# Allegro board TNSP_USBHUB3.brd
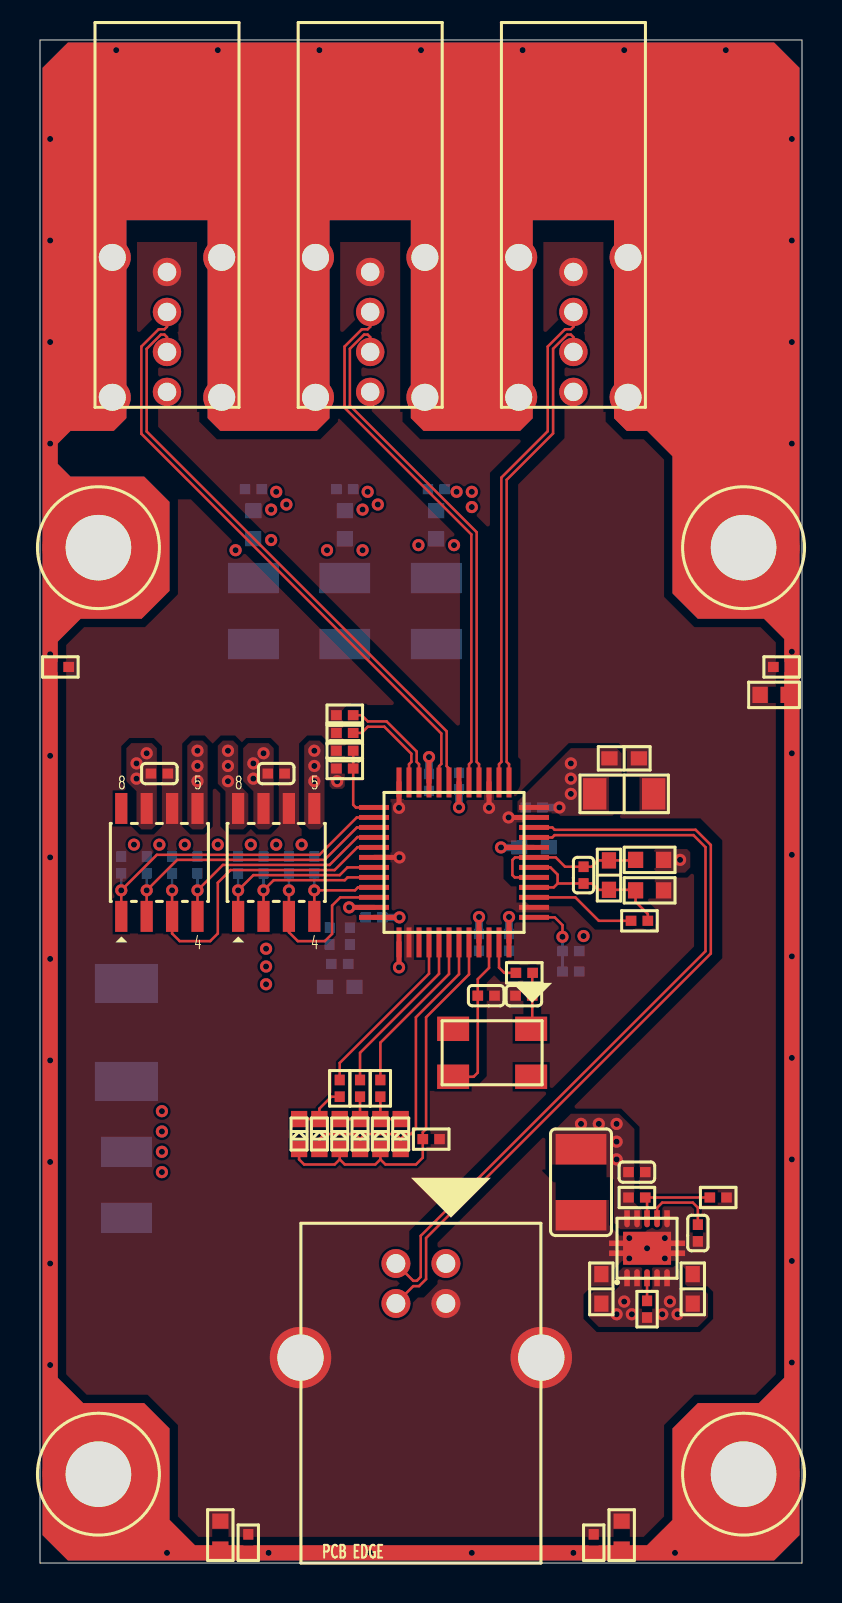
[diagram p0: board, top side]
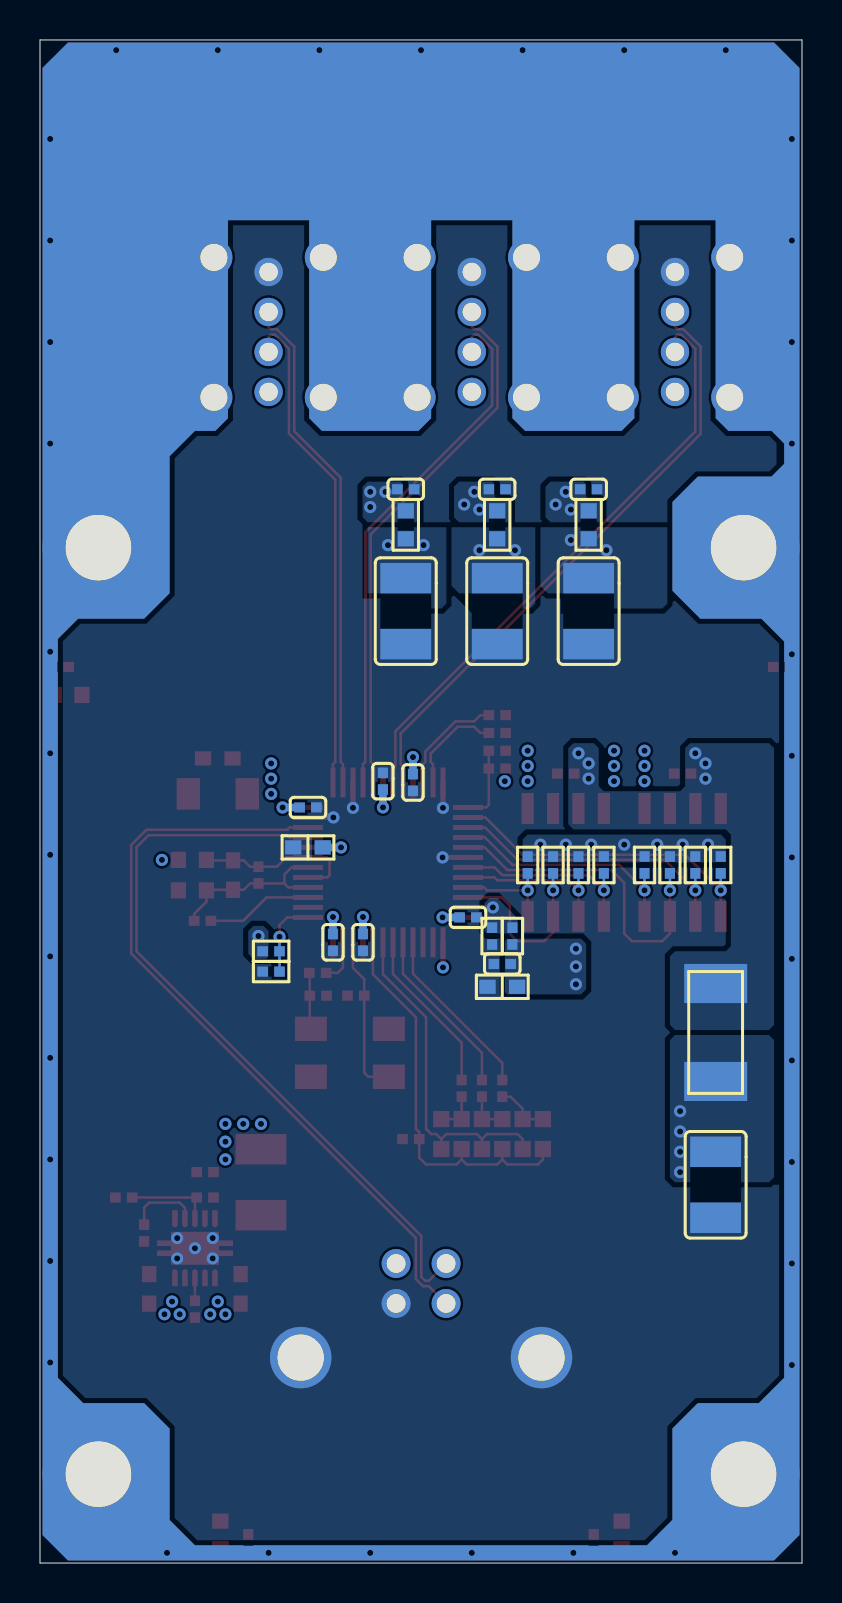
[diagram p1: board, bottom side, seen from below]

Outline 38.1 x 76.2 mm; copper layers: TOP, L2_GND, L3_PWR, BOTTOM. Coordinates in mm from the lower left corner of the outline.
Outline path: 0,76.2 0,0 38.1,0 38.1,76.2 0,76.2

## Design rules (mm)
net group USB_D1: nets USB_D1_N USB_D1_P
net group USB_D2: nets USB_D2_N USB_D2_P
net group USB_D3: nets USB_D3_N USB_D3_P
net group USB_D4: nets USB_D4_N USB_D4_P
net group USB_UP: nets USB_UP_N USB_UP_P
net group ANALOG SIGNALS: nets AVDD_2V5 AVSS_GND RREF XTAL1 XTAL2 XTAL2_R
net group GND: nets CHASSIS_GND
net group MICS. SIGNALS: nets BUS_B LDO_FB LDO_PG LDO_SS LED1 LED1_R LED2 LED2_R LED3 LED3_R LED_AMBER LED_GREEN SYSRST_L USB1_CS_L USB1_EN_L USB2_CS_L USB2_EN_L USB3_CS_L USB3_EN_L USB4_CS_L USB4_EN_L

## Placement (name value [footprint] x y rotation side)
C1  12pF  [0402C]  22.31 28.39 180 top
C2  10uF  [0603C]  14.99 28.83 180 bottom
C3  1uF  [0402C]  14.99 29.97 180 bottom
C4  12pF  [0402C]  24.19 28.38 0 top
C5  1uF  [0402C]  19.81 53.72 0 bottom
C6  1uF  [0402C]  15.24 53.72 0 bottom
C7  10uF  [0603C]  24.7 35.8 180 bottom
C8  1uF  [0402C]  20.95 39.12 270 bottom
C9  1uF  [0402C]  16.7 32.3 0 bottom
C10  1uF  [0402C]  21.95 31.05 90 bottom
C11  1uF  [0402C]  10.67 53.72 0 bottom
C13  22uF  [1206C]  29.21 38.48 180 top
C14  4.7uF  [0603C]  29.21 40.26 180 top
C15  4.7uF  [0603C]  28.45 34.42 90 top
C16  1uF  [0402C]  27.18 34.42 90 top
C17  1uF  [0402C]  15.24 40.64 0 top
C18  1uF  [0402C]  11.81 39.5 180 top
C19  100uF  [1210C]  15.24 47.62 270 bottom
C20  100uF  [1210C]  19.81 47.62 270 bottom
C21  0.1uF  [0402C]  24.7 37.8 0 bottom
C22  0.1uF  [0402C]  23.45 31.05 90 bottom
C23  0.1uF  [0402C]  19.45 39.05 90 bottom
C24  1uF  [0402C]  5.97 39.5 180 top
C26  100uF  [1210C]  10.67 47.62 270 bottom
C27  100uF  [1210C]  4.32 18.92 270 bottom
C28  1uF  [0402C]  29.84 19.56 180 top
C29  100uF  [1210C]  27.05 19.05 270 top
C30  10uF  [0603C]  32.64 13.72 270 top
C31  10uF  [0603C]  28.07 13.72 270 top
C32  DNL_1n0F  [0402C]  32.89 16.51 90 top
CN1  USB_B_RECP  [MOLEX_670688011]  19.04 10.28 0 top
CN2  USB_A_VERT_RECP  [MOLEX_672983091]  26.67 58.59 0 top
CN3  USB_A_VERT_RECP  [MOLEX_672983091]  16.51 58.59 0 top
CN4  USB_A_VERT_RECP  [MOLEX_672983091]  6.35 58.59 0 top
D1  LED_GRN_0603  [SMTLED_0603]  18.03 21.46 90 top
D2  LED_GRN_0603  [SMTLED_0603]  17.02 21.46 90 top
D3  LED_GRN_0603  [SMTLED_0603]  16 21.46 90 top
D4  LED_GRN_0603  [SMTLED_0603]  14.99 21.46 90 top
D5  LED_GRN_0603  [SMTLED_0603]  13.97 21.46 90 top
D6  LED_GRN_0603  [SMTLED_0603]  12.95 21.46 90 top
F1  2A_125V  [FUSE_SMD]  4.32 26.54 90 bottom
FB1  60OHM_100MHZ_1A  [0603L]  30.48 35.18 180 top
FB2  60OHM_100MHZ_1A  [0603L]  30.48 33.66 180 top
FB4  60OHM_100MHZ_1A  [0603L]  19.81 51.94 90 bottom
FB5  60OHM_100MHZ_1A  [0603L]  36.7 43.43 180 top
FB6  60OHM_100MHZ_1A  [0603L]  15.24 51.94 90 bottom
FB7  60OHM_100MHZ_1A  [0603L]  9.02 1.4 90 top
FB8  60OHM_100MHZ_1A  [0603L]  29.08 1.4 90 top
FB9  60OHM_100MHZ_1A  [0603L]  10.67 51.94 90 bottom
MH1  DNL  [MH_129X220_PTH]  2.92 4.45 0 top
MH2  DNL  [MH_129X220_PTH]  35.18 4.45 0 top
MH3  DNL  [MH_129X220_PTH]  2.92 50.8 0 top
MH4  DNL  [MH_129X220_PTH]  35.18 50.8 0 top
R1  33.2  [0402R]  24.21 29.53 180 top
R2  10K  [0402R]  14.48 31.37 270 bottom
R3  15K  [0402R]  15.49 31.37 90 bottom
R4  0  [0402R]  26.54 30.61 0 bottom
R5  DNL_0  [0402R]  26.54 29.59 180 bottom
R6  10K  [0402R]  19.56 21.21 180 top
R7  470  [0402R]  17.02 23.75 90 top
R8  470  [0402R]  16 23.75 90 top
R9  470  [0402R]  14.99 23.75 90 top
R11  2.43K  [0402R]  29.97 32.13 0 top
R12  10K  [0402R]  15.24 39.75 180 top
R13  510K  [0402R]  13.72 34.92 90 bottom
R14  510K  [0402R]  9.91 34.92 90 bottom
R15  10K  [0402R]  12.45 34.92 90 bottom
R16  10K  [0402R]  11.18 34.92 90 bottom
R17  510K  [0402R]  7.87 34.92 90 bottom
R18  510K  [0402R]  4.06 34.92 90 bottom
R19  10K  [0402R]  6.6 34.92 90 bottom
R20  10K  [0402R]  5.33 34.92 90 bottom
R21  3.57K  [0402R]  29.84 18.29 180 top
R22  1.15K  [0402R]  33.91 18.29 180 top
R23  10K  [0402R]  30.35 12.7 270 top
R24  0  [0402R]  15.24 41.53 0 top
R25  0  [0402R]  15.24 42.42 0 top
R26  0  [0402R]  10.41 1.02 270 top
R27  0  [0402R]  27.69 1.02 270 top
R28  0  [0402R]  37.08 44.83 0 top
R29  0  [0402R]  1.02 44.83 180 top
U1  UPD720114_QFP  [NEC_TQFP_48]  20.7 35.05 90 top
U2  AP1212  [DIODES_SOP_8L]  11.81 35.05 0 top
U3  AP1212  [DIODES_SOP_8L]  5.97 35.05 0 top
U4  TPS74801  [TI_SON_10]  30.35 15.75 0 top
X1  30MHZ_50PPM  [XTAL_VXM5]  22.61 25.53 180 top

## Library data of the parts
C1 C4 = C_12PF_0402_50V_5P_1500-1206
C2 C7 C30 C31 = C_10UF_0603_6V3_20P_1500-1141
C3 C5 C6 C8-C11 C16-C18 C24 C28 = C_1UF_0402_6V3_10P_1500-1146
C13 = C_22UF_1206_6V3_10P_1500-1097
C14 C15 = C_4U7F_0603_6V3_15P_1500-1207
C19 C20 C26 C27 C29 = C_100UF_1210_6V3_20P_1500-1194
C21-C23 = C_0U1F_0402_16V_10P_1500-1135
C32 = C_0402_16V_20P_X7R_1n0F
CN1 = 3000-1393_USB_B_RECP
CN2-CN4 = 3000-1394_USB_A_VERT_RECP
D1-D6 = LED_0603_GRN_3100-1045
F1 = FUSE_2A_125V_NANO_2300-1027
FB1 FB2 FB4-FB9 = FB_0603_60OHM_1A_2100-1019
MH1-MH4 = MH_129x220_PTH
R1 = R_33R2_0402_1P_1000-1380
R2 R6 R12 R15 R16 R19 R20 R23 = R_10K_0402_1P_1000-1234
R3 = R_15K_0402_5P_1000-1505
R4 R5 R24-R29 = R_0_0402_5P_1000-1377
R7-R9 = R_470_0402_5P_1000-1506
R11 = R_2K43_0402_1P_1000-1503
R13 R14 R17 R18 = R_510K_0402_5P_1000-1504
R21 = R_3K57_0402_1P_1000-1344
R22 = R_1K15_0402_1P_1000-1345
U1 = 4000-1384_UPD720114_TQFP48
U2 U3 = 4000-1385_AP1212L_SOL8L
U4 = IC_TPS74801_SON10_3X3_ADJ_REG
X1 = XTAL_30MHZ_4P_VXM5_1900-1069

## Footprints (pads in the part's own frame, mm; a bottom-side part is the same pattern mirrored in y, then rotated)
0402C
  rect 0.533x0.508 smd: 1(0.419,0) 2(-0.419,0)
0402R
  rect 0.533x0.508 smd: 1(0.419,0) 2(-0.419,0)
0603C
  rect 0.813x0.711 smd: 1(0.737,0) 2(-0.737,0)
0603L
  rect 0.762x0.813 smd: 1(-0.701,0) 2(0.701,0)
1206C
  rect 1.168x1.575 smd: 1(1.473,0) 2(-1.473,0)
1210C
  rect 1.524x2.54 smd: 1(-1.651,0) 2(1.651,0)
DIODES_SOP_8L
  rect 0.61x1.549 smd: 1(-1.905,-2.7) 2(-0.635,-2.7) 3(0.635,-2.7) 4(1.905,-2.7) 5(1.905,2.7) 6(0.635,2.7) 7(-0.635,2.7) 8(-1.905,2.7)
FUSE_SMD
  rect 1.956x3.15 smd: 1(-2.451,0) 2(2.451,0)
MH_129X220_PTH
  round 5.588 hole 3.277: 1(0,0)
MOLEX_670688011
  round 1.448 hole 0.94: 1(1.25,4.709) 2(-1.25,4.709) 3(-1.25,2.71) 4(1.25,2.71)
  round 3.073 hole 2.311: 5(-6.02,0) 6(6.02,0)
MOLEX_672983091
  round 1.42 hole 0.92: 1(0,0) 2(0,2) 3(0,4) 4(0,6)
  round 1.85 hole 1.35: 5(-2.735,-0.27) 6(2.735,-0.27) 7(-2.735,6.73) 8(2.735,6.73)
NEC_TQFP_48
  rect 1.5x0.25 smd: 1(-4,2.75) 2(-4,2.25) 3(-4,1.75) 4(-4,1.25) 5(-4,0.75) 6(-4,0.25) 7(-4,-0.25) 8(-4,-0.75) 9(-4,-1.25) 10(-4,-1.75) 11(-4,-2.25) 12(-4,-2.75) 25(4,-2.75) 26(4,-2.25) 27(4,-1.75) 28(4,-1.25) 29(4,-0.75) 30(4,-0.25) 31(4,0.25) 32(4,0.75) 33(4,1.25) 34(4,1.75) 35(4,2.25) 36(4,2.75)
  rect 0.25x1.5 smd: 13(-2.75,-4) 14(-2.25,-4) 15(-1.75,-4) 16(-1.25,-4) 17(-0.75,-4) 18(-0.25,-4) 19(0.25,-4) 20(0.75,-4) 21(1.25,-4) 22(1.75,-4) 23(2.25,-4) 24(2.75,-4) 37(2.75,4) 38(2.25,4) 39(1.75,4) 40(1.25,4) 41(0.75,4) 42(0.25,4) 43(-0.25,4) 44(-0.75,4) 45(-1.25,4) 46(-1.75,4) 47(-2.25,4) 48(-2.75,4)
SMTLED_0603
  rect 0.813x0.813 smd: 1(-0.749,0) 2(0.749,0)
TI_SON_10
  custom 0.28x0.85 smd: 1(-1,-1.475) 2(-0.5,-1.475) 3(0,-1.475) 4(0.5,-1.475) 5(1,-1.475) 6(1,1.475) 7(0.5,1.475) 8(0,1.475) 9(-0.5,1.475) 10(-1,1.475)
  custom 3.8x1.65 smd: 11(0,0)
XTAL_VXM5
  rect 1.6x1.219 smd: 1(-1.951,-1.199) 2(1.951,-1.199) 3(1.951,1.199) 4(-1.951,1.199)

## Nets
AVDD_2V5: C15.1 C16.1 FB1.2 U1.17(AVDD#17) U1.19(AVDD#19)
AVSS_GND: C15.2 C16.2 FB2.2 R11.1 U1.16(AVSS(R)) U1.18(AVSS)
GND: C1.2 C2.2 C3.2 C4.2 C5.2 C6.2 C7.2 C8.2 C9.2 C10.2 C11.2 C13.2 C14.2 C17.2 C18.2 C19.2 C20.2 C21.2 C22.2 C23.2 C24.2 C26.2 C27.2 C28.2 C29.2 C30.2 C31.2 C32.2 CN1.4(GND) CN1.5(FG1) CN1.6(FG2) CN2.4(GND) CN3.4(GND) CN4.4(GND) FB2.1 FB5.2 FB7.2 FB8.2 R3.2 R5.2 R6.2 R22.2 R24.2 R25.2 R26.2 R27.2 R28.2 R29.2 U1.2(VSSREG) U1.14(TEST) U1.23(VSS#23) U1.27(VSS#27) U1.36(VSS#36) U1.42(VSS#42) U2.6(GND) U3.6(GND) U4.6(GND) U4.11(PAD)
VBUS_5V0: C2.1 C3.1 C27.1 C30.1 C31.1 CN1.1(VBUS) F1.1 R2.1 R23.1 U4.1(VIN1) U4.2(VIN2) U4.4(BIAS) U4.5(EN)
VBUS_MON: R2.2 R3.1 U1.47(VBUSM)
VDD_3V3: C7.1 C8.1 C9.1 C10.1 C28.1 C29.1 R4.1 R12.1 R13.1 R14.1 R15.1 R16.1 R17.1 R18.1 R19.1 R20.1 R21.1 U1.9(VDD33#9) U1.20(VDD33#20) U1.30(VDD33#30) U1.48(VDD33REG) U4.9(VOUT2) U4.10(VOUT1)
VDDOUT_2V5: C13.1 C14.1 C21.1 C22.1 C23.1 FB1.1 U1.1(VDD25OUT) U1.12(VDD25#12) U1.24(VDD25#24) U1.33(VDD25#33)
BUS_B: R4.2 R5.1 U1.13(BUS_B)
CHASSIS_GND: CN2.5(FG1) CN2.6(FG2) CN2.7(FG3) CN2.8(FG4) CN3.5(FG1) CN3.6(FG2) CN3.7(FG3) CN3.8(FG4) CN4.5(FG1) CN4.6(FG2) CN4.7(FG3) CN4.8(FG4) FB5.1 FB7.1 FB8.1 MH1.1 MH2.1 MH3.1 MH4.1 R26.1 R27.1 R28.1 R29.1
LDO_FB: R21.2 R22.1 U4.8(FB)
LDO_PG: R23.2 U4.3(PGD)
LDO_SS: C32.1 U4.7(SS)
LED1: R7.1 U1.6(LED1)
LED1_R: D1.2(CATHODE) D2.2(CATHODE) R7.2
LED2: R8.1 U1.5(LED2)
LED2_R: D3.2(CATHODE) D4.2(CATHODE) R8.2
LED3: R9.1 U1.4(LED3)
LED3_R: D5.2(CATHODE) D6.2(CATHODE) R9.2
LED_AMBER: D2.1(ANODE) D4.1(ANODE) D6.1(ANODE) R6.1 U1.8(AMBER)
LED_GREEN: D1.1(ANODE) D3.1(ANODE) D5.1(ANODE) U1.7(GREEN)
RREF: R11.2 U1.15(RREF)
SYSRST_L: C17.1 R12.2 U1.37(SYSRSTB)
USB1_CS_L: R15.2 U1.46(CSB1) U2.3(FLG2)
USB1_EN_L: R13.2 U1.45(PPB1) U2.4(EN2_L)
USB2_CS_L: R16.2 U1.44(CSB2) U2.2(FLG1)
USB2_EN_L: R14.2 U1.43(PPB2) U2.1(EN1_L)
USB3_CS_L: R19.2 U1.41(CSB3) U3.3(FLG2)
USB3_EN_L: R17.2 U1.40(PPB3) U3.4(EN2_L)
USB4_CS_L: R20.2 U1.39(CSB4) U3.2(FLG1)
USB4_EN_L: R18.2 U1.38(PPB4) U3.1(EN1_L)
USB_D1_N: CN2.2(D_N) U1.25(DM1)
USB_D1_P: CN2.3(D_P) U1.26(DP1)
USB_D2_N: CN3.2(D_N) U1.28(DM2)
USB_D2_P: CN3.3(D_P) U1.29(DP2)
USB_D3_N: CN4.2(D_N) U1.31(DM3)
USB_D3_P: CN4.3(D_P) U1.32(DP3)
USB_D4_N: R25.1 U1.34(DM4)
USB_D4_P: R24.1 U1.35(DP4)
USB_UP_N: CN1.2(D_N) U1.21(DMU)
USB_UP_P: CN1.3(D_P) U1.22(DPU)
VFIL1_5V0: C5.1 CN2.1(VBUS) FB4.2
VFIL2_5V0: C6.1 CN3.1(VBUS) FB6.2
VFIL3_5V0: C11.1 CN4.1(VBUS) FB9.2
VPORT1_5V0: C20.1 FB4.1 U2.5(OUT2)
VPORT2_5V0: C19.1 FB6.1 U2.8(OUT1)
VPORT3_5V0: C26.1 FB9.1 U3.5(OUT2)
VPORT_5V0: C18.1 C24.1 F1.2 U2.7(IN) U3.7(IN)
XTAL1: C1.1 U1.10(X1) X1.3(X2)
XTAL2: R1.1 U1.11(X2)
XTAL2_R: C4.1 R1.2 X1.1(X1)

Pads without a net: U1 3; U3 8; X1 2 4

## Via types
v1: diameter 0.61, hole 0.305, TOP to BOTTOM, 125 vias

## Routing (per net, layer and track width the routed paths; a pad name or vN(x,y) marks a point on that pad's centre or on a via; arc(x,y) is an arc through that point)
AVDD_2V5: length 8.4
  TOP w0.127: FB1.2 29.75,35.15 C15.1 27.91,35.15 27.6,34.84 C16.1 26.25,34.84 25.79,35.3 U1.19 23.75,35.3 23.62,35.17 23.62,34.42 23.74,34.3 U1.17
AVSS_GND: length 8.9
  TOP w0.127: R11.1 30.39,32.47 29.78,33.09 FB2.2 29.75,33.68 C15.2 27.91,33.68 27.6,34 C16.2 25.88,34 ; 25.88,34 25.88,34.44 25.52,34.8 U1.18 ; 25.88,34 25.68,33.8 U1.16
GND: length 5.1
  TOP w0.254: U1.36 v1(17.95,37.78) ; U1.27 v1(22.45,37.78) ; U1.23 v1(23.43,37.3) ; U1.42 v1(17.97,35.3)
  vias: v1(29.46,16.26) v1(29.46,15.24) v1(30.35,15.75) v1(31.24,16.26) v1(31.24,15.24)
VBUS_5V0:
  vias: v1(6.1,22.61) v1(6.1,21.59) v1(6.1,20.57) v1(6.1,19.56) v1(11.3,30.73) v1(11.3,29.84) v1(11.3,28.96) v1(28.83,12.45) v1(29.21,13.08) v1(29.59,12.45) v1(31.11,12.45) v1(31.5,13.08) v1(31.88,12.45)
VBUS_MON: length 1.2
  TOP w0.254: U1.47 v1(15.46,32.8)
VDD_3V3: length 8.9
  TOP w0.254: U1.30 v1(20.95,37.81) ; U1.20 v1(23.05,35.8) ; v1(17.97,32.3) U1.48 ; U1.9 v1(21.95,32.32)
  BOTTOM w0.381: C8.1 20.95,38.69 v1(20.95,37.81) ; v1(21.95,32.32) C10.1 ; C9.1 v1(17.97,32.3) ; v1(23.05,35.8) C7.1
  vias: v1(4.7,35.94) v1(5.97,35.94) v1(7.24,35.94) v1(8.89,35.94) v1(10.54,35.94) v1(11.81,35.94) v1(13.08,35.94) v1(14.86,39.12) v1(27.05,21.97) v1(27.18,31.37) v1(27.94,21.97) v1(28.83,21.97) v1(28.83,21.08) v1(28.83,20.19)
VDDOUT_2V5: length 6.3
  TOP w0.254: U1.12 v1(23.45,32.32) ; U1.1 v1(17.95,29.8) ; v1(19.45,40.32) U1.33
  BOTTOM w0.381: C21.1 v1(25.97,37.8) ; v1(23.45,32.32) C22.1 ; C23.1 v1(19.45,40.32)
  vias: v1(26.54,40.01) v1(26.54,39.24) v1(26.54,38.48) v1(32,35.18)
BUS_B: length 3.9
  TOP w0.127: v1(26.12,31.33) 26.12,31.92 25.74,32.3 U1.13
  BOTTOM w0.127: v1(26.12,31.33) R4.2 R5.1
CHASSIS_GND:
  vias: v1(0.51,71.25) v1(0.51,66.17) v1(0.51,61.09) v1(0.51,56.01) v1(0.51,45.47) v1(0.51,40.39) v1(0.51,35.31) v1(0.51,30.23) v1(0.51,25.15) v1(0.51,20.07) v1(0.51,14.99) v1(0.51,9.91) v1(3.81,75.69) v1(6.35,0.51) v1(8.89,75.69) v1(11.43,0.51) v1(13.97,75.69) v1(16.51,0.51) v1(19.05,75.69) v1(21.59,0.51) v1(24.13,75.69) v1(26.67,0.51) v1(29.21,75.69) v1(31.75,0.51) v1(34.29,75.69) v1(37.59,71.25) v1(37.59,66.17) v1(37.59,61.09) v1(37.59,56.01) v1(37.59,45.59) v1(37.59,40.51) v1(37.59,35.43) v1(37.59,30.35) v1(37.59,25.27) v1(37.59,20.19) v1(37.59,15.11) v1(37.59,10.03)
LDO_FB: length 4.3
  TOP w0.127: U4.8 30.35,18.2 R21.2 R22.1
LDO_PG: length 1.2
  TOP w0.127: U4.3 R23.2
LDO_SS: length 3.7
  TOP w0.127: U4.7 30.85,17.77 31.11,18.03 32.64,18.03 32.89,17.78 C32.1
LED1: length 8.3
  TOP w0.127: R7.1 17.02,26.04 20.45,29.47 U1.6
LED1_R: length 2.1
  TOP w0.127: D1.2 D2.2 R7.2
LED2: length 8.5
  TOP w0.127: U1.5 19.95,29.48 16,25.53 R8.1
LED2_R: length 2.1
  TOP w0.127: R8.2 D3.2 D4.2
LED3: length 8.7
  TOP w0.127: U1.4 19.45,29.48 14.99,25.02 R9.1
LED3_R: length 2.8
  TOP w0.127: D6.2 D5.2 13.97,22.73 14.57,23.33 R9.2
LED_AMBER: length 20.1
  TOP w0.127: 14.99,20.19 14.73,19.94 13.21,19.94 12.95,20.19 D6.1 ; 14.99,20.19 15.24,19.94 16.76,19.94 17.02,20.19 ; 14.99,20.19 D4.1 ; 17.02,20.19 D2.1 ; 17.02,20.19 17.27,19.94 18.8,19.94 19.14,20.28 R6.1 19.14,21.55 19.3,21.72 19.3,27.3 21.45,29.45 U1.8
LED_GREEN: length 17.2
  TOP w0.127: U1.7 20.95,29.46 18.8,27.3 18.8,21.72 18.54,21.46 18.29,21.46 18.03,21.21 ; D1.1 18.03,21.21 ; 18.03,21.21 17.78,21.46 16.26,21.46 16,21.21 ; 16,21.21 15.75,21.46 14.22,21.46 13.97,21.21 D5.1 ; 16,21.21 D3.1
RREF: length 5.3
  TOP w0.127: U1.15 26.77,33.3 27.94,32.13 R11.2
SYSRST_L: length 3.8
  TOP w0.127: U1.37 15.79,37.8 15.66,37.93 R12.2 C17.1
USB1_CS_L: length 9.1
  TOP w0.127: U1.46 15.01,33.3 14.6,32.89 14.6,31.48 14.24,31.12 12.89,31.12 12.45,31.56 U2.3 v1(12.45,33.66)
  BOTTOM w0.127: R15.2 v1(12.45,33.66)
USB1_EN_L: length 5.2
  TOP w0.127: U2.4 v1(13.72,33.66) 15.75,33.66 15.9,33.8 U1.45
  BOTTOM w0.127: R13.2 v1(13.72,33.66)
USB2_CS_L: length 7.9
  TOP w0.127: U2.2 v1(11.18,33.66) 11.68,34.16 15.24,34.16 15.38,34.3 U1.44
  BOTTOM w0.127: R16.2 v1(11.18,33.66)
USB2_EN_L: length 9.4
  TOP w0.127: U1.43 15.37,34.8 14.99,34.42 10.67,34.42 v1(9.91,33.66) U2.1
  BOTTOM w0.127: R14.2 v1(9.91,33.66)
USB3_CS_L: length 16.7
  TOP w0.127: v1(6.6,33.66) U3.3 6.6,31.5 6.98,31.12 8.51,31.12 8.89,31.5 8.89,34.04 9.53,34.67 14.73,34.67 15.88,35.81 16.69,35.81 U1.41
  BOTTOM w0.127: R19.2 v1(6.6,33.66)
USB3_EN_L: length 12.1
  TOP w0.127: U3.4 v1(7.87,33.66) 9.14,34.92 14.48,34.92 15.88,36.32 16.68,36.32 U1.40
  BOTTOM w0.127: R17.2 v1(7.87,33.66)
USB4_CS_L: length 14.8
  TOP w0.127: 5.33,32.35 v1(5.33,33.66) 6.86,35.18 14.22,35.18 15.85,36.8 U1.39
  BOTTOM w0.127: R20.2 v1(5.33,33.66)
USB4_EN_L: length 16.3
  TOP w0.127: U3.1 v1(4.06,33.66) 5.84,35.43 13.97,35.43 15.84,37.3 U1.38
  BOTTOM w0.127: R18.2 v1(4.06,33.66)
USB_D1_N: length 24.8
  TOP w0.127: U1.25 23.45,39.97 23.33,40.08 23.33,54.2 25.65,56.52 25.65,60.75 26.36,61.46 26.54,61.46 26.67,61.33 CN2.2
USB_D1_P: length 25.3
  TOP w0.127: CN2.3 26.67,61.85 26.54,61.73 26.25,61.73 25.39,60.86 25.39,56.63 23.07,54.31 23.07,40.08 22.95,39.97 U1.26
USB_D2_N: length 26.5
  TOP w0.127: CN3.2 16.51,61.33 16.38,61.46 16.2,61.46 15.49,60.75 15.49,57.91 21.83,51.57 21.83,40.08 21.95,39.97 U1.28
USB_D2_P: length 26.9
  TOP w0.127: U1.29 21.45,39.97 21.57,40.08 21.57,51.46 15.23,57.8 15.23,60.86 16.09,61.73 16.38,61.73 16.51,61.85 CN3.3
USB_D3_N: length 30.1
  TOP w0.127: U1.31 20.45,39.75 20.33,39.87 20.33,41.61 5.33,56.61 5.33,60.75 6.04,61.46 6.22,61.46 6.35,61.33 CN4.2
USB_D3_P: length 30.5
  TOP w0.127: U1.32 19.95,39.86 20.07,39.98 20.07,41.5 5.07,56.5 5.07,60.86 5.93,61.73 6.22,61.73 6.35,61.85 CN4.3
USB_D4_N: length 5.5
  TOP w0.127: R25.1 16.08,42.42 16.39,42.11 17.33,42.11 18.83,40.6 18.83,40.08 18.95,39.97 U1.34
USB_D4_P: length 5.1
  TOP w0.127: U1.35 18.45,39.97 18.57,40.08 18.57,40.49 17.22,41.84 16.39,41.84 16.08,41.53 R24.1
USB_UP_N: length 37.9
  TOP w0.127: U1.21 25.61,36.3 25.73,36.42 32.67,36.42 33.27,35.81 33.27,30.61 19.04,16.37 19.04,14.32 18.84,14.12 18.66,14.12 CN1.2
USB_UP_P: length 38.8
  TOP w0.127: CN1.3 18.66,13.85 18.95,13.85 19.3,14.21 19.3,16.26 33.54,30.5 33.54,35.92 32.78,36.69 25.73,36.69 25.61,36.8 U1.22
VFIL1_5V0:
  vias: v1(20.83,53.59) v1(21.59,53.59) v1(21.59,52.83)
VFIL2_5V0:
  vias: v1(16.13,52.7) v1(16.38,53.59) v1(16.89,52.96)
VFIL3_5V0:
  vias: v1(11.56,52.7) v1(11.81,53.59) v1(12.32,52.96)
VPORT1_5V0:
  vias: v1(13.72,40.64) v1(13.72,39.88) v1(13.72,39.12) v1(18.92,50.93) v1(20.7,50.93)
VPORT2_5V0:
  vias: v1(9.4,40.64) v1(9.4,39.88) v1(9.4,39.12) v1(14.35,50.67) v1(16.13,50.67)
VPORT3_5V0:
  vias: v1(7.87,40.64) v1(7.87,39.88) v1(7.87,39.12) v1(9.78,50.67) v1(11.56,51.18)
VPORT_5V0:
  vias: v1(4.83,40.01) v1(4.83,39.24) v1(5.33,40.51) v1(10.67,40.01) v1(10.67,39.24) v1(11.18,40.51)
XTAL1: length 8.1
  TOP w0.127: U1.10 22.45,29.77 21.89,29.21 C1.1 21.89,24.54 21.68,24.33 X1.3
XTAL2: length 2.2
  TOP w0.127: R1.1 23.21,29.53 22.95,29.79 U1.11
XTAL2_R: length 2.8
  TOP w0.127: R1.2 24.61,29.51 C4.1 24.61,26.78 X1.1

## Copper pours and planes (outline as drawn; the poured copper is in the pictures)
GND on TOP: 0.76,0.89 37.21,0.89 37.21,75.31 0.76,75.31 ; 15 cut-outs
GND on BOTTOM: 5.21,6.86 5.21,2.41 7.11,0.51 32.51,0.51 33.27,1.27 33.27,2.79 33.21,2.86 37.46,7.11 37.46,64.13 32.89,68.71 14.73,68.71 14.73,67.06 10.29,62.61 8.89,62.61 8.89,65.66 8.51,66.04 8.51,67.44 5.84,67.44 5.59,67.18 5.59,67.06 4.45,67.06 4.45,66.04 4.19,66.04 4.19,62.74 1.27,59.82 1.27,54.48 0.38,53.59 0.38,25.53 0.76,25.15 0.38,24.77 0.38,9.14 2.67,6.86 ; 1 cut-out
GND on L2_GND: 7.11,0.44 5.21,2.35 5.21,6.79 2.67,6.79 0.38,9.08 0.38,24.7 0.76,25.08 0.38,25.46 0.38,53.53 1.27,54.42 1.27,59.75 4.19,62.67 4.19,65.98 4.45,65.98 4.45,66.99 5.59,66.99 5.59,67.12 5.84,67.37 8.51,67.37 8.51,65.98 8.89,65.6 8.89,62.55 10.29,62.55 14.73,66.99 14.73,68.64 32.89,68.64 37.46,64.07 37.46,7.05 33.21,2.79 33.27,2.73 33.27,1.21 32.51,0.44
VBUS_5V0 on TOP: 32,14.61 32,13.84 32.26,13.59 33.27,13.59 33.4,13.46 33.4,12.32 32.89,11.81 27.94,11.81 27.43,12.32 27.43,13.34 27.69,13.59 28.7,13.59 28.96,13.84 28.96,14.61 29.21,14.86 31.75,14.86
VBUS_5V0 on BOTTOM: 6.35,19.05 6.6,19.3 6.6,26.16 6.35,26.42 1.65,26.42 1.4,26.16 1.4,19.3 1.65,19.05
VBUS_5V0 on BOTTOM: 14.73,31.24 14.86,31.12 14.86,28.57 14.73,28.45 11.05,28.45 10.79,28.7 10.79,30.99 11.05,31.24
VBUS_5V0 on L3_PWR: 37.85,1.91 36.58,0.64 1.65,0.64 0.38,1.91 0.38,33.02 11.18,33.02 12.45,31.75 12.45,23.5 18.8,17.14 37.85,17.14
VBUS_MON on BOTTOM: 15.88,33.02 15.62,33.27 15.24,33.27 14.22,32.26 14.22,31.5 15.75,31.5 15.88,31.62
VDD_3V3 on TOP: 29.08,16.64 28.7,17.02 28.7,19.18 28.57,19.3 25.78,19.3 25.65,19.43 25.78,19.43 25.78,19.94 25.53,19.94 25.53,21.46 26.54,22.48 28.96,22.48 29.72,21.72 29.72,18.03 30.1,17.65 30.1,16.76 29.97,16.64
VDD_3V3 on BOTTOM: 3.81,35.05 13.97,35.05 13.97,36.2 13.72,36.45 4.06,36.45 3.81,36.2
VDD_3V3 on BOTTOM: 26.67,30.35 26.8,30.23 27.43,30.23 27.69,30.48 27.69,31.62 27.43,31.88 26.92,31.88 26.67,31.62
VDD_3V3 on L3_PWR: 37.85,17.14 18.8,17.14 12.45,23.5 12.45,31.75 11.18,33.02 0.38,33.02 0.38,47.62 4.83,47.62 6.1,46.35 6.1,37.47 14.35,37.47 14.35,40.01 14.99,40.64 17.53,40.64 19.43,38.73 23.88,38.73 23.88,34.92 22.61,33.66 22.61,31.12 16.89,31.12 16.89,28.57 18.16,27.3 23.88,27.3 25.15,28.57 25.15,31.75 27.05,33.66 37.85,33.66
VDDOUT_2V5 on TOP: 30.86,34.54 30.61,34.8 30.61,35.56 30.86,35.81 32.26,35.81 32.51,35.56 32.51,34.8 32.26,34.54
VDDOUT_2V5 on TOP: 28.83,40.77 29.08,40.51 29.08,37.85 28.57,37.34 25.78,37.34 25.65,37.47 23.88,37.47 23.88,38.1 26.54,40.77
VDDOUT_2V5 on L3_PWR: 17.53,43.81 17.53,40.64 19.43,38.73 23.88,38.73 23.88,34.92 22.61,33.66 22.61,31.12 16.89,31.12 16.89,27.3 25.15,27.3 25.15,31.75 27.05,33.66 37.85,33.66 37.85,46.35 32.13,52.07 21.97,52.07 21.97,48.26
CHASSIS_GND on TOP (solid shape): 37.97,74.8 37.97,1.4 36.7,0.13 1.4,0.13 0.13,1.4 0.13,45.09 0.86,45.09 0.86,44.58 0.89,44.58 0.89,9.27 2.16,8 5.21,8 6.48,6.73 6.48,2.16 7.75,0.89 10.16,0.89 10.16,0.86 10.67,0.86 10.67,0.89 27.43,0.89 27.43,0.86 27.94,0.86 27.94,0.89 30.35,0.89 31.62,2.16 31.62,6.73 32.89,8 35.94,8 37.21,9.27 37.21,44.58 37.24,44.58 37.24,45.09 37.21,45.09 37.21,46.23 36.2,47.24 32.89,47.24 31.62,48.51 31.62,55.37 30.35,56.64 29.34,56.64 28.7,57.28 28.7,67.18 24.64,67.18 24.64,57.28 24,56.64 19.18,56.64 18.54,57.28 18.54,67.18 14.48,67.18 14.48,57.28 13.84,56.64 9.02,56.64 8.38,57.28 8.38,67.18 4.32,67.18 4.32,57.28 3.68,56.64 1.52,56.64 0.89,56.01 0.89,54.99 1.52,54.36 5.21,54.36 6.48,53.09 6.48,48.64 5.08,47.24 2.03,47.24 0.89,46.1 0.89,45.09 0.13,45.09 0.13,74.8 1.4,76.07 36.7,76.07
CHASSIS_GND on BOTTOM (solid shape): 37.97,74.8 37.97,1.4 36.7,0.13 1.4,0.13 0.13,1.4 0.13,45.09 0.86,45.09 0.86,44.58 0.89,44.58 0.89,9.27 2.16,8 5.21,8 6.48,6.73 6.48,2.16 7.75,0.89 10.16,0.89 10.16,0.86 10.67,0.86 10.67,0.89 27.43,0.89 27.43,0.86 27.94,0.86 27.94,0.89 30.35,0.89 31.62,2.16 31.62,6.73 32.89,8 35.94,8 37.21,9.27 37.21,44.58 37.24,44.58 37.24,45.09 37.21,45.09 37.21,46.23 36.2,47.24 32.89,47.24 31.62,48.51 31.62,55.37 30.35,56.64 29.34,56.64 28.7,57.28 28.7,67.18 24.64,67.18 24.64,57.28 24,56.64 19.18,56.64 18.54,57.28 18.54,67.18 14.48,67.18 14.48,57.28 13.84,56.64 9.02,56.64 8.38,57.28 8.38,67.18 4.32,67.18 4.32,57.28 3.68,56.64 1.52,56.64 0.89,56.01 0.89,54.99 1.52,54.36 5.21,54.36 6.48,53.09 6.48,48.64 5.08,47.24 2.03,47.24 0.89,46.1 0.89,45.09 0.13,45.09 0.13,74.8 1.4,76.07 36.7,76.07
CHASSIS_GND on L2_GND (solid shape): 37.97,74.8 37.97,1.4 36.7,0.13 1.4,0.13 0.13,1.4 0.13,45.09 0.86,45.09 0.86,44.58 0.89,44.58 0.89,9.27 2.16,8 5.21,8 6.48,6.73 6.48,2.16 7.75,0.89 10.16,0.89 10.16,0.86 10.67,0.86 10.67,0.89 27.43,0.89 27.43,0.86 27.94,0.86 27.94,0.89 30.35,0.89 31.62,2.16 31.62,6.73 32.89,8 35.94,8 37.21,9.27 37.21,44.58 37.24,44.58 37.24,45.09 37.21,45.09 37.21,46.23 36.2,47.24 32.89,47.24 31.62,48.51 31.62,55.37 30.35,56.64 29.34,56.64 28.7,57.28 28.7,67.18 24.64,67.18 24.64,57.28 24,56.64 19.18,56.64 18.54,57.28 18.54,67.18 14.48,67.18 14.48,57.28 13.84,56.64 9.02,56.64 8.38,57.28 8.38,67.18 4.32,67.18 4.32,57.28 3.68,56.64 1.52,56.64 0.89,56.01 0.89,54.99 1.52,54.36 5.21,54.36 6.48,53.09 6.48,48.64 5.08,47.24 2.03,47.24 0.89,46.1 0.89,45.09 0.13,45.09 0.13,74.8 1.4,76.07 36.7,76.07
CHASSIS_GND on L3_PWR (solid shape): 37.97,74.8 37.97,1.4 36.7,0.13 1.4,0.13 0.13,1.4 0.13,45.09 0.86,45.09 0.86,44.58 0.89,44.58 0.89,9.27 2.16,8 5.21,8 6.48,6.73 6.48,2.16 7.75,0.89 10.16,0.89 10.16,0.86 10.67,0.86 10.67,0.89 27.43,0.89 27.43,0.86 27.94,0.86 27.94,0.89 30.35,0.89 31.62,2.16 31.62,6.73 32.89,8 35.94,8 37.21,9.27 37.21,44.58 37.24,44.58 37.24,45.09 37.21,45.09 37.21,46.23 36.2,47.24 32.89,47.24 31.62,48.51 31.62,55.37 30.35,56.64 29.34,56.64 28.7,57.28 28.7,67.18 24.64,67.18 24.64,57.28 24,56.64 19.18,56.64 18.54,57.28 18.54,67.18 14.48,67.18 14.48,57.28 13.84,56.64 9.02,56.64 8.38,57.28 8.38,67.18 4.32,67.18 4.32,57.28 3.68,56.64 1.52,56.64 0.89,56.01 0.89,54.99 1.52,54.36 5.21,54.36 6.48,53.09 6.48,48.64 5.08,47.24 2.03,47.24 0.89,46.1 0.89,45.09 0.13,45.09 0.13,74.8 1.4,76.07 36.7,76.07
VFIL1_5V0 on BOTTOM: 19.94,53.34 19.81,53.21 19.3,53.21 19.18,53.09 19.18,52.2 19.3,52.07 21.72,52.07 21.97,52.32 21.97,53.85 21.72,54.1 20.07,54.1 19.94,53.98
VFIL1_5V0 on L3_PWR: 17.4,52.07 31.62,52.07 31.62,66.93 30.1,68.45 25.53,68.45 19.18,62.1 19.18,56.64 17.4,54.86
VFIL2_5V0 on BOTTOM: 15.37,53.34 15.24,53.21 14.73,53.21 14.6,53.09 14.6,52.2 14.73,52.07 17.14,52.07 17.4,52.32 17.4,53.85 17.14,54.1 15.49,54.1 15.37,53.98
VFIL2_5V0 on L3_PWR: 13.08,52.07 17.53,52.07 17.53,54.99 19.18,56.64 18.54,57.28 18.54,67.18 14.48,67.18 14.48,57.28 13.84,56.64 13.08,56.64
VFIL3_5V0 on BOTTOM: 10.79,53.34 10.67,53.21 10.16,53.21 10.03,53.09 10.03,52.2 10.16,52.07 12.57,52.07 12.83,52.32 12.83,53.85 12.57,54.1 10.92,54.1 10.79,53.98
VFIL3_5V0 on BOTTOM: 13.08,52.07 13.08,56.64 9.02,56.64 8.38,57.28 8.38,67.18 4.32,67.18 4.32,57.28 3.68,56.64 1.52,56.64 0.89,56.01 0.89,54.99 1.52,54.36 5.21,54.36 6.48,53.09 6.48,52.07
VFIL3_5V0 on L3_PWR: 13.08,52.07 13.08,56.64 9.02,56.64 8.38,57.28 8.38,67.31 4.32,67.31 4.32,57.28 3.68,56.64 1.52,56.64 0.89,56.01 0.89,54.99 1.52,54.36 5.21,54.36 6.48,53.09 6.48,52.07
VPORT1_5V0 on TOP: 14.22,36.96 14.22,40.89 13.97,41.15 13.46,41.15 13.21,40.89 13.21,36.96 13.46,36.7 13.97,36.7
VPORT1_5V0 on BOTTOM: 21.72,51.82 21.72,48.51 20.57,48.51 19.81,47.75 18.03,47.75 17.78,48.01 17.78,51.82
VPORT1_5V0 on L3_PWR: 11.81,37.47 14.35,37.47 14.35,40.01 14.99,40.64 17.53,40.64 17.53,43.81 21.97,48.26 21.97,52.07 17.53,52.07 17.53,48.9 11.81,43.18
VPORT2_5V0 on TOP: 9.27,36.96 9.27,38.61 8.89,38.99 8.89,40.89 9.14,41.15 9.65,41.15 9.91,40.89 9.91,38.99 10.41,38.48 10.41,36.96 10.16,36.7 9.53,36.7
VPORT2_5V0 on BOTTOM: 13.59,47.75 13.33,48.01 13.33,51.82 17.53,51.82 17.53,48.9 17.14,48.51 16.26,48.51 16.26,48.01 16.64,48.01 16.38,47.75
VPORT2_5V0 on L3_PWR: 11.81,37.47 11.81,43.18 17.53,48.9 17.53,52.07 13.08,52.07 13.08,48.9 8.64,44.45 8.64,37.47
VPORT3_5V0 on TOP: 7.37,36.96 7.37,40.89 7.62,41.15 8.13,41.15 8.38,40.89 8.38,36.96 8.13,36.7 7.62,36.7
VPORT3_5V0 on BOTTOM: 6.98,47.75 6.73,48.01 6.73,51.82 13.08,51.82 13.08,48.9 12.7,48.51 11.81,48.51 11.81,47.75
VPORT3_5V0 on L3_PWR: 8.64,37.47 8.64,44.45 13.08,48.9 13.08,52.07 4.83,52.07 4.83,38.73 6.1,37.47
VPORT_5V0 on TOP: 5.84,36.96 5.84,40.77 5.59,41.02 4.57,41.02 4.32,40.77 4.32,39.12 4.83,38.61 4.83,36.96 5.08,36.7 5.59,36.7
VPORT_5V0 on TOP: 11.68,36.96 11.68,40.77 11.43,41.02 10.41,41.02 10.16,40.77 10.16,39.12 10.67,38.61 10.67,36.96 10.92,36.7 11.43,36.7
VPORT_5V0 on BOTTOM: 1.4,40.77 1.65,41.02 5.59,41.02 5.84,40.77 5.84,38.86 6.1,38.61 9.91,38.61 10.16,38.86 10.16,40.77 10.41,41.02 11.43,41.02 11.68,40.77 11.68,36.96 11.43,36.7 3.81,36.7 3.56,36.45 3.56,30.86 3.81,30.61 6.35,30.61 6.6,30.35 6.6,26.92 6.35,26.67 1.65,26.67 1.4,26.92

Small or netless copper shapes (teardrops, artwork), in the pictures only: 1 on TOP

## Text on the board
DXF_08MAR18: 4X | dia | PLATED PAD | .220 | KEEP OUT AREA | .129 | .320 | TYP | THRU | 2.368 | 1.825 | .415 | .175 | 0 | .115 | .135 | .535 | 1.500 | .684 | .935 | 1.270 | .063 | .160 | MAXIMUM COMPONENT  HEIGHT | .600 | MAXIMUM COMPONENT HEIGHT | SECONDARY SIDE | PRIMARY SIDE | .107
